# EAGLE board isp_hvp_shield_topor_01 (EAGLE 7.2.0)
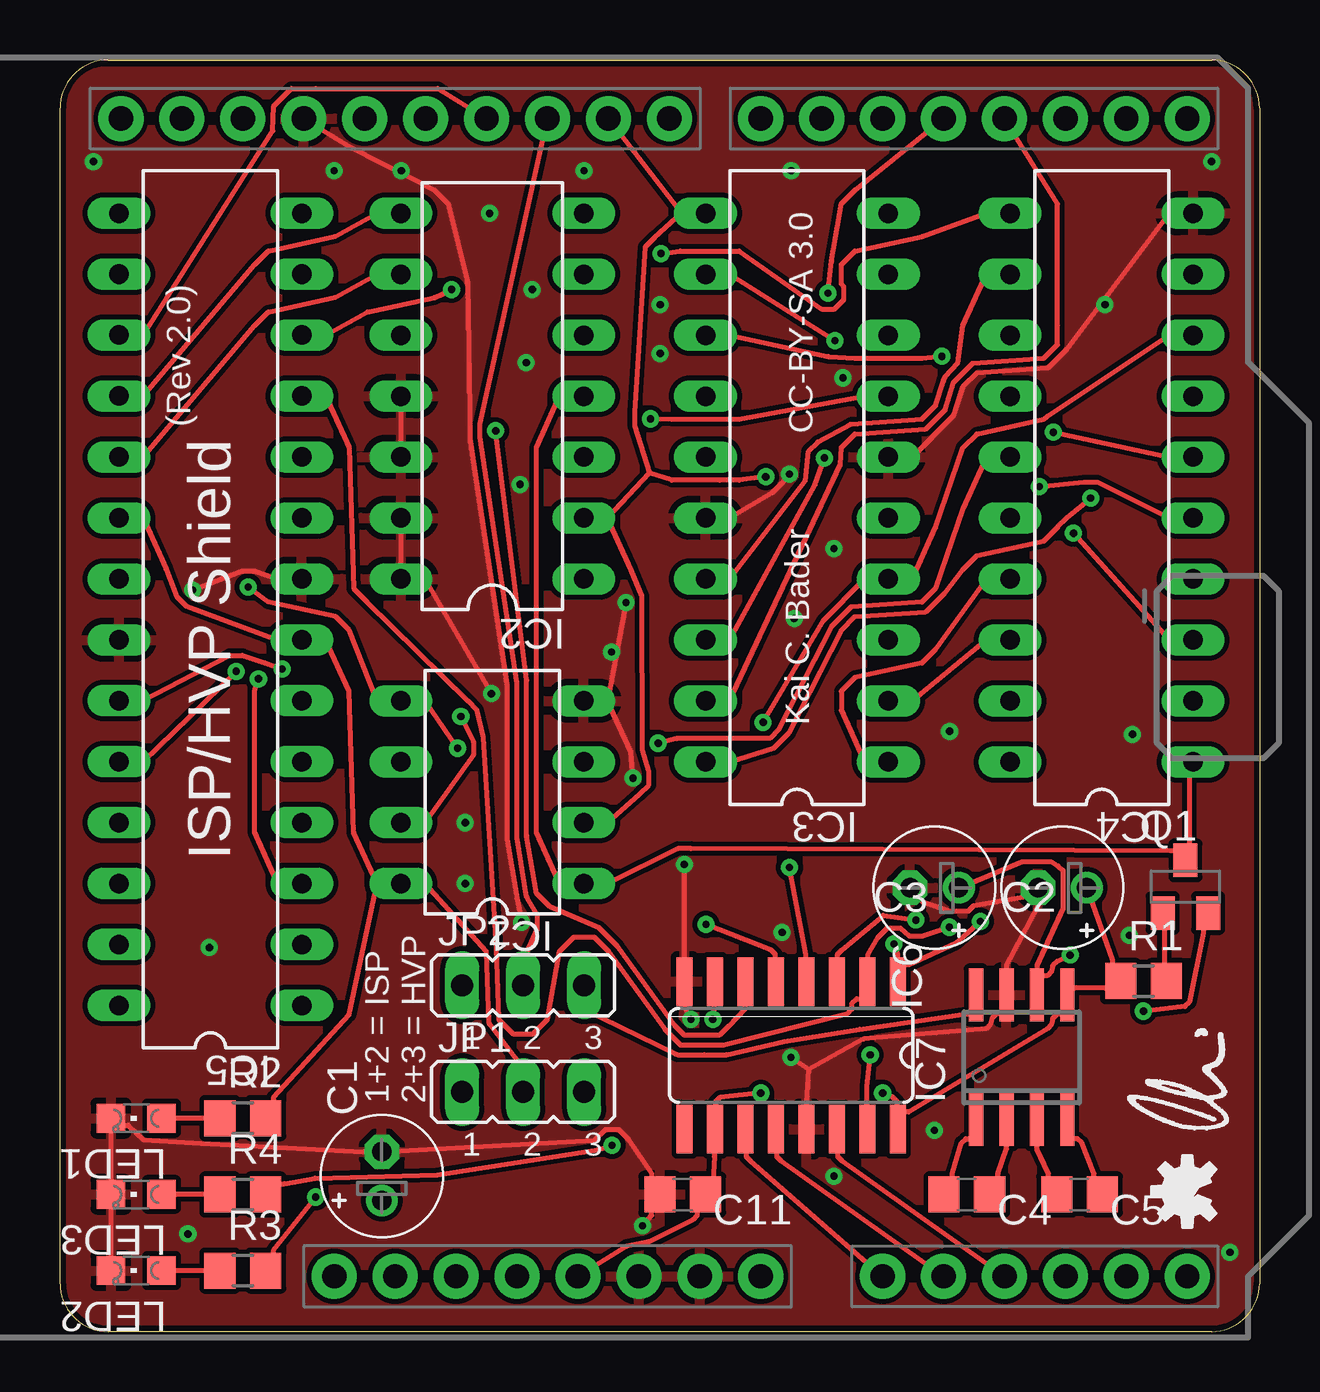
[diagram p0: board, top side]
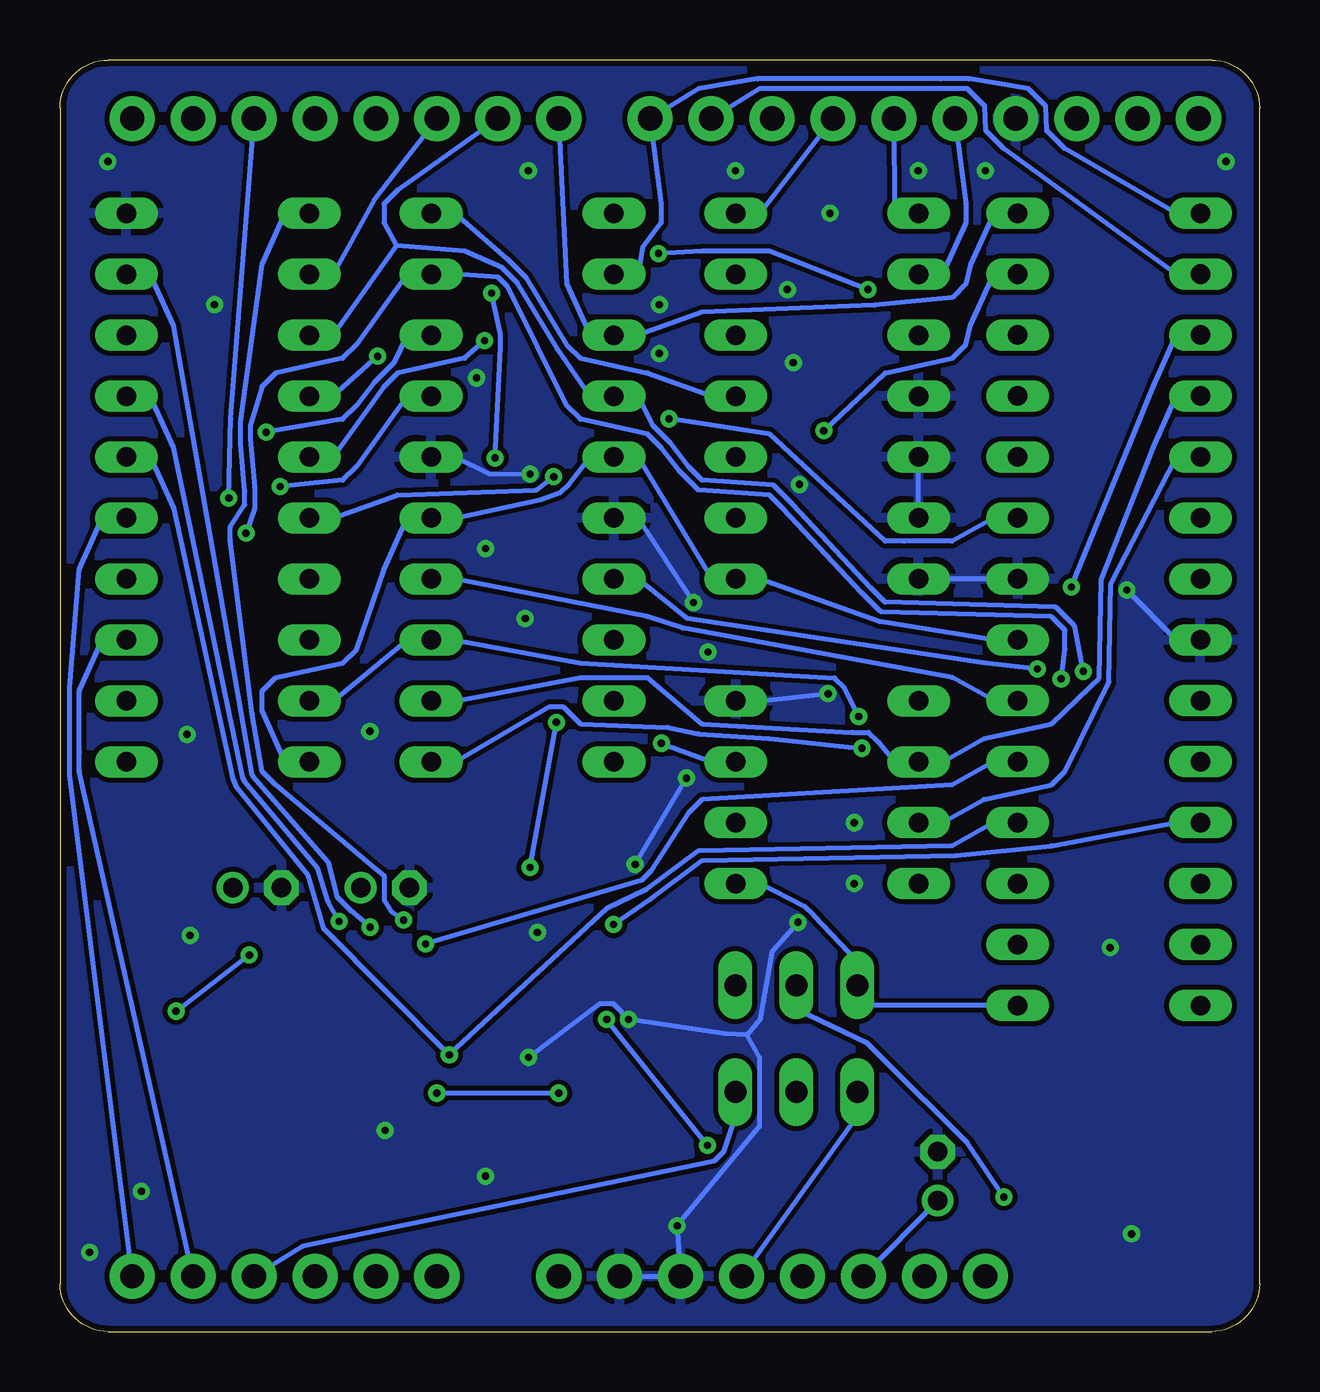
[diagram p1: board, bottom side, seen from below]

Size 50 x 53 mm. Coordinates in mm from the lower left corner, seen from the top.
Outline: 0,2 0,51 arc-90 2,53 48,53 arc-90 50,51 50,2 arc-90 48,0 2,0 arc-90 0,2
Copper layers (1*16): TOP 0.035mm / dielectric 1.5mm / BOTTOM 0.035mm
Design rules "ITEADstudio_DRC": minimum track width 6mil, minimum drill 12mil, track to track 6mil, track to pad 6mil, pad to pad 6mil, via to via 6mil, smd to smd 0mil, copper to edge 10mil, drill to drill 10mil, minimum pad ring 10mil, minimum via ring 6mil, stop-mask expansion 2mil, vias tented up to drill 100mil, thermal gap 10mil
Net classes: 0 default: width 0.203 mm, clearance 0.203 mm

## Footprints (pad centres in the part's own frame; a part is rotated, then mirrored left to right if it is on the bottom)
E2-5 = drill 0.813 pad 1.321: + -1.016,0 | drill 0.813 pad 1.429 octagon: - 1.016,0
C0805 = smd 1.3 x 1.5: 1 -0.95,0; 2 0.95,0
DIL08 = drill 0.813 pad 1.321 long: 1 -3.81,-3.81; 2 -1.27,-3.81; 3 1.27,-3.81; 4 3.81,-3.81; 5 3.81,3.81; 6 1.27,3.81; 7 -1.27,3.81; 8 -3.81,3.81
DIL14 = drill 0.813 pad 1.321 long: 1 -7.62,-3.81; 2 -5.08,-3.81; 3 -2.54,-3.81; 4 0,-3.81; 5 2.54,-3.81; 6 5.08,-3.81; 7 7.62,-3.81; 8 7.62,3.81; 9 5.08,3.81; 10 2.54,3.81; 11 0,3.81; 12 -2.54,3.81; 13 -5.08,3.81; 14 -7.62,3.81
DIL20 = drill 0.813 pad 1.321 long: 1 -11.43,-3.81; 2 -8.89,-3.81; 3 -6.35,-3.81; 4 -3.81,-3.81; 5 -1.27,-3.81; 6 1.27,-3.81; 7 3.81,-3.81; 8 6.35,-3.81; 9 8.89,-3.81; 10 11.43,-3.81; 11 11.43,3.81; 12 8.89,3.81; 13 6.35,3.81; 14 3.81,3.81; 15 1.27,3.81; 16 -1.27,3.81; 17 -3.81,3.81; 18 -6.35,3.81; 19 -8.89,3.81; 20 -11.43,3.81
DIL28 = drill 0.813 pad 1.321 long: 1 -11.43,-3.81; 2 -8.89,-3.81; 3 -6.35,-3.81; 4 -3.81,-3.81; 5 -1.27,-3.81; 6 1.27,-3.81; 7 3.81,-3.81; 8 6.35,-3.81; 9 8.89,-3.81; 10 11.43,-3.81; 11 13.97,-3.81; 12 16.51,-3.81; 13 19.05,-3.81; 14 21.59,-3.81; 15 21.59,3.81; 16 19.05,3.81; 17 16.51,3.81; 18 13.97,3.81; 19 11.43,3.81; 20 8.89,3.81; 21 6.35,3.81; 22 3.81,3.81; 23 1.27,3.81; 24 -1.27,3.81; 25 -3.81,3.81; 26 -6.35,3.81; 27 -8.89,3.81; 28 -11.43,3.81
SO16 = smd 0.66 x 2.032: 1 -4.445,-3.073; 2 -3.175,-3.073; 3 -1.905,-3.073; 4 -0.635,-3.073; 5 0.635,-3.073; 6 1.905,-3.073; 7 3.175,-3.073; 8 4.445,-3.073; 9 4.445,3.073; 10 3.175,3.073; 11 1.905,3.073; 12 0.635,3.073; 13 -0.635,3.073; 14 -1.905,3.073; 15 -3.175,3.073; 16 -4.445,3.073
SO08 = smd 0.6 x 2.2: 1 -1.905,-2.6; 2 -0.635,-2.6; 3 0.635,-2.6; 4 1.905,-2.6; 5 1.905,2.6; 6 0.635,2.6; 7 -0.635,2.6; 8 -1.905,2.6
JP2 = drill 0.914 pad 1.422 long: 1 -2.54,0; 2 0,0; 3 2.54,0
CHIPLED_0805 = smd 1.2 x 1.2: A 0,-1.05; C 0,1.05
UNO_R3_SHIELD = drill 1.016 pad 1.88: 3.3V 50.8,26.67; 5V 50.8,29.21; A0 50.8,41.91; A1 50.8,44.45; A2 50.8,46.99; A3 50.8,49.53; A4 50.8,52.07; A5 50.8,54.61; AREF 2.54,15.24; D2 2.54,49.53; D3 2.54,46.99; D4 2.54,44.45; D5 2.54,41.91; D6 2.54,39.37; D7 2.54,36.83; D8 2.54,33.02; D9 2.54,30.48; D10 2.54,27.94; D11 2.54,25.4; D12 2.54,22.86; D13 2.54,20.32; GND@0 50.8,31.75; GND@1 50.8,34.29; GND@2 2.54,17.78; IOREF 50.8,21.59; NC 50.8,19.05; RES 50.8,24.13; RX 2.54,54.61; SCL 2.54,10.16; SDA 2.54,12.7; TX 2.54,52.07; VIN 50.8,36.83
SOT23-BEC = smd 1 x 1.4: B -0.95,-1.1; C 0,1.1; E 0.95,-1.1
R0805 = smd 1.3 x 1.5: 1 -0.95,0; 2 0.95,0

## Placement (x,y rotation side)
C1  10uF  [E2-5]  13.41,6.48 90 top
C2  4.7uF  [E2-5]  41.78,18.5 180 top
C3  4.7uF  [E2-5]  36.45,18.5 180 top
C4  0.22uF  [C0805]  37.8,5.71 180 top
C5  0.22uF  [C0805]  42.5,5.71 180 top
C11  0.1uF  [C0805]  25.95,5.71 180 top
IC1  ATtiny13/15/25/45/85  [DIL08]  18.02,22.48 90 top
IC2  ATtiny24/44/84  [DIL14]  18.02,38.99 90 top
IC3  TINY26/261/461/861  [DIL20]  30.72,35.18 90 top
IC4  ATtiny2313/4313  [DIL20]  43.42,35.18 90 top
IC5  ATMEGA328  [DIL28]  6.27,25.02 90 top
IC6  74HCT595D  [SO16]  30.48,11.51 180 top
IC7  MAX662A  [SO08]  40.09,11.43 0 top
JP1  [JP2]  19.3,9.99 0 top
JP2  [JP2]  19.3,14.43 0 top
LED1  [CHIPLED_0805]  3.17,8.89 90 top
LED2  [CHIPLED_0805]  3.17,2.54 90 top
LED3  [CHIPLED_0805]  3.17,5.71 90 top
PINS  [UNO_R3_SHIELD]  -7.62,53.1 270 top
Q1  BC858BSMD  [SOT23-BEC]  46.91,18.54 0 top
R1  47k  [R0805]  45.16,14.61 0 top
R2  220  [R0805]  7.62,8.89 0 top
R3  220  [R0805]  7.62,2.54 0 top
R4  220  [R0805]  7.62,5.71 0 top
U$1  [OSHW-LOGO-S]  46.99,5.84 90 top
U$3  [KAI-LOGO-M]  48.9,8.26 90 top

## Library data of the parts
C1-C5 C11 R1-R4 = rcl
IC1-IC5 IC7 PINS U$1 U$3 = kaibader
IC6 = 74xx-eu
JP1 JP2 = jumper
LED1-LED3 = led
Q1 = transistor-pnp

## Nets
220: LED2.A R3.1
+5V: IC1.8 IC2.1 IC3.5 IC3.15 IC4.20 IC5.7 IC5.20 JP1.2 R2.2
A0_SCK: IC6.11 PINS.A0
A1_RCK: IC6.12 PINS.A1
A2_SER: IC6.14 PINS.A2
A3_POWER: JP1.3 PINS.A3
A4: IC3.9 IC4.3 IC5.3 PINS.A4
A5: IC3.7 IC4.5 IC5.9 PINS.A5
AREF: IC5.21
D2: IC3.20 PINS.D2
D3: IC3.19 PINS.D3
D4: IC3.18 PINS.D4
D5: IC3.17 IC4.12 IC5.23 PINS.D5
D6: IC3.14 IC4.13 IC5.24 PINS.D6
D7: IC3.13 IC4.14 IC5.14 PINS.D7
D8: IC1.3 IC3.12 IC4.15 IC5.15 PINS.D8
D9: IC1.2 IC2.2 IC3.11 IC4.16 IC5.16 PINS.D9
D10: JP2.2 PINS.D10 R3.2
D10_RESET: IC1.1 IC2.4 IC3.10 IC4.1 IC5.1 JP2.1 Q1.C
D11_MOSI: IC1.5 IC2.7 IC3.1 IC4.17 IC5.17 PINS.D11
D12_MISO: IC1.6 IC2.8 IC3.2 IC4.18 IC5.18 PINS.D12
D13_SCK: IC1.7 IC2.9 IC3.3 IC4.19 IC5.19 PINS.D13
GND: C1.- C2.- C3.- C11.2 IC1.4 IC2.11 IC2.12 IC2.13 IC2.14 IC3.6 IC3.16 IC4.10 IC5.8 IC5.22 IC6.8 IC6.13 IC7.7 LED1.C LED2.C LED3.C PINS.GND@0 PINS.GND@1 PINS.GND@2
N$1: IC7.8 JP2.3
N$2: C1.+ PINS.RES
N$3: Q1.B R1.2
N$4: C5.1 IC7.4
N$5: C5.2 IC7.3
N$6: C4.1 IC7.2
N$7: C4.2 IC7.1
N$8: LED1.A R2.1
N$10: LED3.A R4.1
Q0: IC3.8 IC4.6 IC5.4 IC6.15
Q1: IC4.7 IC5.5 IC6.1
Q2: IC4.9 IC5.11 IC6.2
Q3: IC4.11 IC5.12 IC6.3
Q4: IC3.4 IC4.8 IC5.6 IC6.4
Q5: IC5.25 IC6.5
Q6: IC5.13 IC6.6
Q7: IC6.7 R4.2
RX: PINS.RX
TX: PINS.TX
VCC: C2.+ C11.1 IC6.10 IC6.16 IC7.5 JP1.1 PINS.5V R1.1
VOUT: C3.+ IC7.6 Q1.E

## Tracks (layer width: path | path; a pad name or v marks a point on that pad's centre or on a via)
220
  TOP 0.203: R3.1 6.12,2.54 6.02,2.54 4.83,2.54 4.72,2.54 LED2.A
+5V
  TOP 0.203: IC1.8 13.21,18.67 | 13.21,18.67 12.24,20.81 12.05,26.69 11.08,28.83 IC5.7 9.08,28.83 5.26,30.25 4.87,30.63 4.43,31.77 3.46,33.91 IC5.20 | R2.2 8.91,9.54 8.91,9.64 8.91,9.77 12.05,13.19 13.21,18.67 | 13.21,18.67 IC1.8 | JP1.2 19.3,10.99 17.91,12.82 17.88,12.88 17.78,15.85 15.21,18.67 IC1.8
  BOTTOM 0.203: IC5.7 11.08,28.83 15.84,29.59 20.83,31.37 IC2.1 22.83,31.37 25.91,36.45 IC3.15 27.91,36.45 28.76,35.35 29.15,34.97 29.97,34.67 33.53,33.91 IC3.5 35.53,33.91 36.5,31.77 37.64,28.43 38.21,27.86 41.01,27.25 41.58,26.69 41.58,25.89 40.61,23.75 IC4.20
A0_SCK
  TOP 0.203: IC6.11 28.6,7.52 28.6,7.42 28.6,7.29 28.78,7.12 PINS.A0
A1_RCK
  TOP 0.203: IC6.12 29.87,7.52 29.87,7.42 29.87,7.29 30.05,7.12 PINS.A1
A2_SER
  TOP 0.203: IC6.14 32.41,7.52 32.41,7.42 32.41,7.29 32.59,7.12 PINS.A2
A3_POWER
  BOTTOM 0.203: JP1.3 21.84,8.99 22.35,7.48 22.74,7.1 39.89,3.54 PINS.A3
A4  (via drill 0.3 pad 0.71)
  TOP 0.203: IC5.3 9.08,18.67 8.11,20.81 8.11,21.61 8.11,26.69 v8.27,27.21 | v42.24,33.27 46.23,28.83 IC4.3
  BOTTOM 0.203: v8.27,27.21 8.11,28.43 8.11,29.23 8.68,29.8 15.75,30 15.8,30.01 16.57,30.78 19.86,34.31 20.43,34.88 23.37,35.08 23.42,35.09 24.19,35.86 24.94,36.85 25.51,37.41 28.31,38.02 28.88,38.59 31.35,43.55 31.74,43.94 33.53,44.07 IC3.9 35.53,44.07 37.64,41.13 38.21,40.56 41.01,39.95 41.58,39.39 42.07,37.76 42.07,37.21 41.89,35.18 41.89,34.3 v42.24,33.27 | PINS.A4 49.2,23.35 49.2,24.15 49.2,26.69 48.23,28.83 IC4.3
A5  (via drill 0.3 pad 0.71)
  TOP 0.203: v24.61,38.04 25.51,38.02 27.51,38.02 28.31,38.02 33.53,38.99 IC3.7 | v40.83,35.22 42.69,35.4 43.23,35.4 46.23,33.91 IC4.5
  BOTTOM 0.203: PINS.A5 49.6,23.2 49.6,24.29 49.6,26.83 49.2,31.77 48.23,33.91 IC4.5 | IC5.9 11.08,33.91 12.81,32.94 14.81,32.94 15.61,32.94 20.43,37.41 v24.61,38.04 | IC3.7 35.53,38.99 37.64,36.05 38.21,35.48 v40.83,35.22
D2  (via drill 0.3 pad 0.71)
  TOP 0.203: IC3.20 27.91,23.75 29.75,24.32 30.38,24.95 32.56,29.23 33.13,29.8 36.07,30 36.12,30.01 36.89,30.78 37.64,31.77 38.21,32.34 41.01,32.94 41.58,33.51 41.58,33.55 41.97,33.93 v42.96,34.74
  BOTTOM 0.203: v42.96,34.74 42.88,38.05 PINS.D2
D3
  TOP 0.203: IC3.19 27.91,26.29 32.52,36.14 32.56,36.85 33.13,37.41 36.07,37.62 36.12,37.63 36.89,38.4 36.9,38.45 37.24,39.53 37.26,39.58 38.02,40.34 38.07,40.36 41.01,40.56 41.58,41.13 41.58,41.93 41.58,47.01 PINS.D3
D4  (via drill 0.3 pad 0.71)
  TOP 0.203: v32.01,43.28 32.16,44.61 32.56,47.01 33.13,47.58 PINS.D4 | IC3.18 27.91,28.83 31.48,35.3 v31.86,36.41
  BOTTOM 0.203: v31.86,36.41 31.64,41.03 31.64,41.58 v32.01,43.28
D5  (via drill 0.3 pad 0.71)
  TOP 0.203: IC5.23 3.46,26.29 7.07,28.18 7.61,28.18 8.54,27.87 v9.26,27.61 | IC3.17 27.91,31.37 31.07,35.47 31.2,36.69 31.59,37.08 32.94,37.8 32.99,37.82 35.93,38.02 36.5,38.59 36.83,39.61 36.91,39.8 37.42,40.38 37.64,41.93 38.61,44.07 IC4.12
  BOTTOM 0.203: v9.26,27.61 11.48,27.87 23.87,29.73 25.91,31.37 IC3.17 | PINS.D5 36.89,47.2 38.61,44.07 IC4.12
D6  (via drill 0.3 pad 0.71)
  TOP 0.203: IC5.24 3.46,23.75 v7.34,27.52
  BOTTOM 0.203: 35.98,45.27 33.13,45.03 31.57,44.35 30.94,43.72 29.27,40.94 27.91,38.99 IC3.14 25.91,38.99 25.27,37.77 24.55,37.03 23.8,36.05 23.23,35.48 20.29,35.28 20.24,35.26 19.47,34.49 16.18,30.97 15.61,30.4 8.54,30.2 8.49,30.19 7.72,29.42 7.71,29.38 v7.34,27.52 | PINS.D6 35.93,47.58 36.5,47.01 36.5,46.21 35.98,45.27 | IC4.13 38.61,41.53 35.98,45.27
D7  (via drill 0.3 pad 0.71)
  TOP 0.203: IC3.13 27.91,41.53 32.03,40.65 33.13,40.56 35.13,40.56 35.93,40.56 v36.76,40.65
  BOTTOM 0.203: PINS.D7 28.88,43.67 27.91,41.53 IC3.13 25.91,41.53 23.23,42.49 16.05,42.77 12.81,43.1 12.24,43.67 12.05,44.47 11.08,46.61 IC5.14 | v36.76,40.65 38.61,38.99 IC4.14
D8  (via drill 0.3 pad 0.71)
  TOP 0.203: IC4.15 38.61,36.45 37.64,34.31 36.5,30.97 35.93,30.4 32.99,30.2 32.94,30.18 32.17,29.41 29.97,25.12 29.59,24.73 25.7,24.71 v24.93,24.52 | IC3.12 27.91,44.07 v32.3,41.31
  BOTTOM 0.203: IC5.15 3.46,46.61 8.14,49.31 8.87,50.04 8.91,51.08 9.64,51.8 12.1,52.21 13.3,52.21 20.92,52.21 23.38,51.8 PINS.D8 24.94,47.01 24.94,46.21 25.71,45.21 25.91,44.07 IC3.12 | v32.3,41.31 33.13,40.56 35.93,39.95 36.5,39.39 38.61,36.45 IC4.15 | v24.93,24.52 22.83,23.75 IC1.3
D9  (via drill 0.3 pad 0.71)
  TOP 0.203: 25.91,46.61 IC3.11 25.91,46.61 | 25.91,46.61 24.77,45.59 24.39,45.21 23.95,38.32 23.95,37.77 24.56,35.77 | IC1.2 22.83,21.21 24.16,22.4 24.55,22.79 24.55,23.34 24.27,24.25 24.25,30.66 23.8,31.77 22.83,33.91 | 22.83,33.91 IC2.2 22.83,33.91 | 22.83,33.91 24.56,35.77 | v29.42,35.63 28.31,35.48 27.51,35.48 25.51,35.48 24.56,35.77 | PINS.D9 25.91,46.61
  BOTTOM 0.203: IC5.16 3.46,44.07 10.68,49.31 11.4,50.04 11.46,51.08 12.18,51.8 13.22,51.8 20.84,51.8 PINS.D9 | IC4.16 38.61,33.91 35.93,34.88 30.14,35.08 v29.42,35.63
D10  (via drill 0.3 pad 0.71)
  TOP 0.203: R3.2 8.91,3.19 8.91,3.42 v10.65,5.6 | JP2.2 19.3,15.43 19.9,16.79 19.9,17.33 19.47,18.08 19.46,18.12 19.05,20.58 19.05,27.03 17.5,37.27 17.5,37.82 PINS.D10
  BOTTOM 0.203: v10.65,5.6 12.2,7.89 15.75,11.41 16.34,12 19.3,13.43 JP2.2
D10_RESET
  TOP 0.203: IC4.1 47.07,23.75 47.07,20.34 47.07,20.24 Q1.C 46.51,20.04 46.41,20.04 46.28,20.04 26.3,20.13 25.75,20.13 22.83,18.67 IC1.1 20.83,18.67 19.86,20.81 19.86,21.61 19.86,36.85 20.83,38.99 IC2.4
  BOTTOM 0.203: IC3.10 33.53,46.61 31.37,44.72 30.57,43.92 28.88,41.13 28.31,40.56 25.51,39.95 22.83,38.99 IC2.4 | IC5.1 11.08,13.59 16.76,13.59 JP2.1 16.76,15.43 18.58,17.33 18.97,17.72 20.83,18.67 IC1.1
D11_MOSI  (via drill 0.3 pad 0.71)
  TOP 0.203: IC4.17 38.61,31.37 36.5,28.43 35.93,27.86 33.13,27.25 32.56,26.69 32.56,25.89 33.53,23.75 IC3.1 | v16.57,24.31 15.21,26.29 IC1.5 13.21,26.29 12.05,29.23 11.48,29.8 8.68,30.41 v7.84,31.03 | IC5.17 3.46,41.53 8.87,50.04 8.91,51.08 9.64,51.8 10.68,51.8 15.76,51.8 PINS.D11
  BOTTOM 0.203: v7.84,31.03 4.43,39.39 3.46,41.53 IC5.17 | PINS.D11 20.83,46.61 IC2.7 | IC3.1 33.53,23.75 29.59,26.05 29.04,26.05 28.31,25.32 24.66,25.18 23.37,24.92 20.43,24.71 v16.57,24.31
D12_MISO
  TOP 0.203: IC4.18 38.61,28.83 35.53,26.29 IC3.2 | IC5.18 3.46,38.99 8.11,44.47 8.68,45.04 11.48,45.65 13.21,46.61 IC2.8
  BOTTOM 0.203: IC3.2 33.53,26.29 28.31,27.25 26.31,27.25 25.51,27.25 23.23,25.32 16.98,24.98 16.3,24.97 15.91,24.59 15.21,23.75 IC1.6 13.21,23.75 11.48,24.72 8.68,25.33 7.07,26.86 6.68,27.24 6.6,31.35 4.43,36.85 3.46,38.99 IC5.18 | PINS.D12 15.21,46.61 IC2.8
D13_SCK  (via drill 0.3 pad 0.71)
  TOP 0.203: IC5.19 3.46,36.45 8.11,41.93 8.68,42.5 11.48,43.11 13.21,44.07 IC2.9 | v16.71,25.64 17.23,24.59 17.23,24.04 15.21,21.21 IC1.7
  BOTTOM 0.203: v16.71,25.64 17.32,26.86 17.71,27.25 28.31,27.86 33.53,28.83 IC3.3 35.53,28.83 38.61,26.29 IC4.19 | IC1.7 13.21,21.21 11.48,22.18 8.68,22.79 8.11,23.35 6.27,27.08 6.19,31.18 3.46,36.45 IC5.19 | PINS.D13 12.24,47.01 12.24,46.21 13.21,44.07 IC2.9
GND  (via drill 0.3 pad 0.71)
  TOP 0.203: v26.3,13.01 26.06,13.44 26.06,13.67 IC6.8 26.03,15.5 v26.03,19.47 | v24.28,4.4 24.66,4.84 24.66,5.07 C11.2 24.66,6.36 24.66,6.59 23.67,8.03 23.29,8.42 22.74,8.42 22.27,7.97 14.18,7.53 13.97,7.53 C1.- 12.64,7.49 5.89,7.83 3.5,7.99 2.85,8.6 2.62,8.6 LED1.C LED3.C LED2.C | v30.47,11.43 31.21,10.93 | v17.98,26.59 15.21,31.37 IC2.14 IC2.13 | v23.89,23.07 23.8,24.15 22.83,26.29 | v5.53,30.91 7.57,31.69 8.12,31.69 9.08,31.37 IC5.8 | IC2.12 IC2.11 | IC6.13 31.14,9.35 31.14,9.58 31.21,10.93 | v30.41,35.74 30.08,35.35 29.69,34.97 27.91,33.91 IC3.16 | v23.59,30.39 22.83,26.29 | 22.83,26.29 IC1.4 | IC4.10 46.23,46.61 41.97,40.94 41.2,40.17 41.15,40.16 38.21,39.95 37.64,39.39 37.31,38.36 37.23,38.17 35.53,36.45 IC3.6 | PINS.GND@2 12.18,49.31 15.61,47.58 16.18,47.01 16.98,43.71 17.09,37.1 18.64,26.86 18.64,20.5 19.05,18.04 v19.24,17.06 | C3.- 35.81,18.08 35.97,17.92 37.06,17.53 37.87,17.53 38.09,17.76 40.15,18.12 40.18,18.15 40.25,18.22 C2.- 40.77,17.72 39.45,15.25 IC7.7 39.25,13.23 39.02,13.23 38.84,13.06 38.78,12.8 38.61,12.62 33.5,12.19 31.21,10.93
  BOTTOM 0.203: IC1.4 20.83,26.29 v17.98,26.59 | IC5.22 3.46,28.83 v5.53,30.91 | IC5.8 11.08,31.37 13.21,31.37 IC2.14 | IC2.13 IC2.12 | 21.36,12.36 20.83,11.41 20.83,8.56 v24.28,4.4 PINS.GND@0 PINS.GND@1 | v19.24,17.06 20.32,15.85 20.83,13.01 21.36,12.36 | 21.36,12.36 22.27,12.41 v26.3,13.01 26.55,13.28 26.94,13.67 27.49,13.67 v30.47,11.43 | v26.03,19.47 v23.89,23.07 | IC3.6 33.53,36.45 32.13,35.75 v30.41,35.74 | IC3.16 25.91,33.91 v23.59,30.39
  other vias: 16.89,18.67 16.89,21.21 22.99,28.32 19.43,40.39 25.02,40.77 32.64,39.75 44.58,16.51 36.45,8.38 32.26,6.48 48.77,3.3 5.33,4.06 6.22,16 1.4,48.77 48.01,48.77 37.08,25.02 44.7,24.89 43.56,42.8 32.26,32.64 17.91,46.61 21.84,48.39 14.22,48.39 11.43,48.39 30.48,48.39 25.02,42.8 19.68,43.43 19.18,35.31 30.1,16.64 30.61,29.72 46.61,5.84
  pour BOTTOM: 50,0 0,0 0,53 50,53
  pour TOP: 0,53 50,53 50,0 0,0
N$1
  TOP 0.203: JP2.3 21.84,13.43 25.66,11.57 25.73,11.53 26.86,11.53 27.78,11.53 30.19,12.09 33.33,12.6 37.75,13.23 37.88,13.23 37.98,13.23 IC7.8
N$2
  BOTTOM 0.203: C1.+ PINS.RES
N$3
  TOP 0.203: Q1.B 46.04,16.84 46.04,16.74 46.04,15.36 46.04,15.25 R1.2
N$4
  TOP 0.203: C5.1 43.1,6.36 43.1,6.46 43.1,6.59 42.59,7.86 42.42,8.04 42.29,8.04 42.19,8.04 IC7.4
N$5
  TOP 0.203: C5.2 41.2,6.36 41.2,6.46 41.2,6.59 40.72,7.61 40.72,7.73 40.72,7.83 IC7.3
N$6
  TOP 0.203: C4.1 39.09,6.36 39.09,6.46 39.09,6.59 39.45,7.61 39.45,7.73 39.45,7.83 IC7.2
N$7
  TOP 0.203: C4.2 37.19,6.36 37.19,6.46 37.19,6.59 37.58,7.86 37.75,8.04 37.88,8.04 37.98,8.04 IC7.1
N$8
  TOP 0.203: R2.1 6.12,8.89 6.02,8.89 4.83,8.89 4.72,8.89 LED1.A
N$10
  TOP 0.203: R4.1 6.12,5.71 6.02,5.71 4.83,5.71 4.72,5.71 LED3.A
Q0  (via drill 0.3 pad 0.71)
  TOP 0.203: IC6.15 33.63,9.35 33.63,9.58 33.63,9.66 33.63,10.21 v33.77,11.53 | v41.41,37.48 46.23,36.45 IC4.6
  BOTTOM 0.203: IC4.6 46.23,36.45 45.26,34.31 42.8,23.04 42.66,22.7 39.67,19.02 39.03,16.82 v33.77,11.53 27.2,17.63 25.58,18.41 23.42,20.02 23.37,20.04 12.81,20.24 11.08,21.21 IC5.4 | IC3.8 35.53,41.53 36.1,40.38 36.89,39.58 37.64,38.59 38.21,38.02 v41.41,37.48
Q1  (via drill 0.3 pad 0.71)
  TOP 0.203: v34.76,16.16 34.9,15.73 34.9,15.5 IC6.1 35.15,15.29 35.38,15.29 37.35,16.19 v38.37,17.1
  BOTTOM 0.203: IC5.5 11.08,23.75 12.81,22.78 23.23,22.18 23.8,21.61 25.36,19.2 25.75,18.81 v34.76,16.16 | v38.37,17.1 38.82,17.91 39.27,19.32 42.31,22.93 42.39,23.12 45.26,36.85 46.23,38.99 IC4.7
Q2  (via drill 0.3 pad 0.71)
  TOP 0.203: IC5.11 11.08,38.99 12.05,36.85 12.24,30.97 12.81,30.4 16.98,26.3 17.37,25.91 17.64,24.75 18.19,15.98 18.29,13.01 18.88,12.41 19.73,12.41 20.32,13.01 20.83,15.85 21.42,16.45 22.27,16.45 22.86,15.85 25.23,12.57 25.86,11.94 26.74,11.94 27.66,11.94 32.84,13.26 33.02,13.44 33.02,13.69 33.2,13.87 33.43,13.87 IC6.2 33.68,15.5 33.68,15.73 34.1,16.43 34.49,16.82 35.03,16.82 35.41,16.49 35.95,16.49 v37.07,16.86
  BOTTOM 0.203: v37.07,16.86 37.87,17.53 38.43,18.09 38.81,19.56 41.97,23.16 41.98,23.2 45.26,41.93 46.23,44.07 IC4.9
Q3  (via drill 0.3 pad 0.71)
  TOP 0.203: IC6.3 32.41,15.5 32.41,15.73 32.59,15.9 34.32,17.35 v35.68,17.15 | v25.05,44.93 25.85,45.03 28.31,45.03 31.74,42.62 32.29,42.62 32.67,43.01 32.67,43.55 32.56,43.67 32.56,44.47 33.13,45.03 35.93,45.64 38.61,46.61 IC4.11 | IC5.12 11.08,41.53 12.81,42.49 15.61,43.1 v16.32,43.44
  BOTTOM 0.203: v35.68,17.15 36.18,17.49 36.48,17.97 36.47,18.97 37.06,19.46 41.01,22.78 41.58,23.35 41.98,25.75 42.9,33 42.9,33.55 42.3,34.47 42.3,35.02 42.48,37.04 42.48,37.92 41.58,44.47 40.61,46.61 IC4.11 | v16.32,43.44 20.43,45.03 23.23,45.03 v25.05,44.93
Q4  (via drill 0.3 pad 0.71)
  TOP 0.203: IC6.4 31.09,15.5 31.09,15.6 31.09,15.73 v30.41,19.34 | IC4.8 46.23,41.53 41.14,38.14 41.01,38.02 38.21,37.41 37.64,36.85 36.5,33.51 35.53,31.37 IC3.4 33.53,31.37 31.83,29.64 v29.31,25.39
  BOTTOM 0.203: IC5.6 11.08,26.29 12.81,27.25 24.03,29.32 25.51,29.8 33.53,31.37 IC3.4 | v30.41,19.34 v29.31,25.39
Q5  (via drill 0.3 pad 0.71)
  TOP 0.203: IC6.5 29.82,15.5 29.82,15.6 29.82,15.73 29.64,15.9 v26.93,16.97
  BOTTOM 0.203: v26.93,16.97 25.38,18.03 23.23,19.64 12.67,19.84 8.68,20.25 3.46,21.21 IC5.25
Q6  (via drill 0.3 pad 0.71)
  TOP 0.203: IC6.6 28.55,13.67 28.55,13.57 28.55,13.44 27.88,12.73 27.49,12.35 26.57,12.35 26.02,12.35 25.64,12.73 23.24,16.05 22.46,16.83 20.43,17.7 19.86,18.27 19.46,20.66 19.46,27.15 v18.16,37.55
  BOTTOM 0.203: v18.16,37.55 15.61,39.95 12.81,40.56 12.24,41.13 12.05,41.93 11.08,44.07 IC5.13
Q7  (via drill 0.3 pad 0.71)
  TOP 0.203: v27.21,13.01 27.28,13.44 27.28,13.67 IC6.7 | R4.2 9.12,6.16 9.35,6.16 10.63,6.39 15.72,6.53 22.4,7.56 v23.01,7.76
  BOTTOM 0.203: v23.01,7.76 v27.21,13.01
VCC  (via drill 0.3 pad 0.71)
  TOP 0.203: C2.+ 43.87,15.48 43.87,15.36 43.87,15.25 R1.1 43.67,14.32 43.56,14.32 42.29,14.32 42.19,14.32 IC7.5 41.79,13.23 41.69,13.23 41.56,13.23 41.38,13.06 41.33,12.8 41.15,12.62 35.38,9.15 35.26,9.15 35.15,9.15 IC6.16 34.9,9.35 34.9,9.45 34.9,9.58 34.72,9.76 v34.29,9.94 | v29.21,9.94 27.51,9.76 27.33,9.58 27.33,9.45 27.33,9.35 IC6.10 27.28,7.52 27.28,7.42 27.28,7.29 27.25,6.59 27.25,6.46 27.25,6.36 C11.1 26.56,5.07 26.56,4.96 26.56,4.84 26.38,4.66 24.55,3.74 23.61,3.54 PINS.5V
  BOTTOM 0.203: JP1.1 16.76,8.99 PINS.5V | v34.29,9.94 v29.21,9.94
VOUT  (via drill 0.3 pad 0.71)
  TOP 0.203: Q1.E 47.66,16.84 47.66,16.62 47.07,13.73 46.89,13.55 v45.16,13.35 | C3.+ 40.11,19.59 41.29,19.59 41.6,19.41 41.81,19.23 41.81,17.64 40.72,15.25 IC7.6 40.92,14.82 41.15,14.82 41.33,15 41.38,15.26 41.56,15.44 v42.11,15.69
  BOTTOM 0.203: v45.16,13.35 v42.11,15.69

## Text on the board
tPlace: (Rev 2.0) | CC-BY-SA 3.0 | Kai C. Bader | ISP/HVP Shield | 1+2 = ISP / 2+3 = HVP